# Altium PCB EE209_PCB.PcbDoc
Units mm, origin at the board's own origin, x right, y up, seen from the top; angles counter-clockwise.
Board outline 93.73 x 96.01 mm, 2 copper layers (Top Layer, Bottom Layer); 55 components, 37 nets, 188 pads, 0 vias.
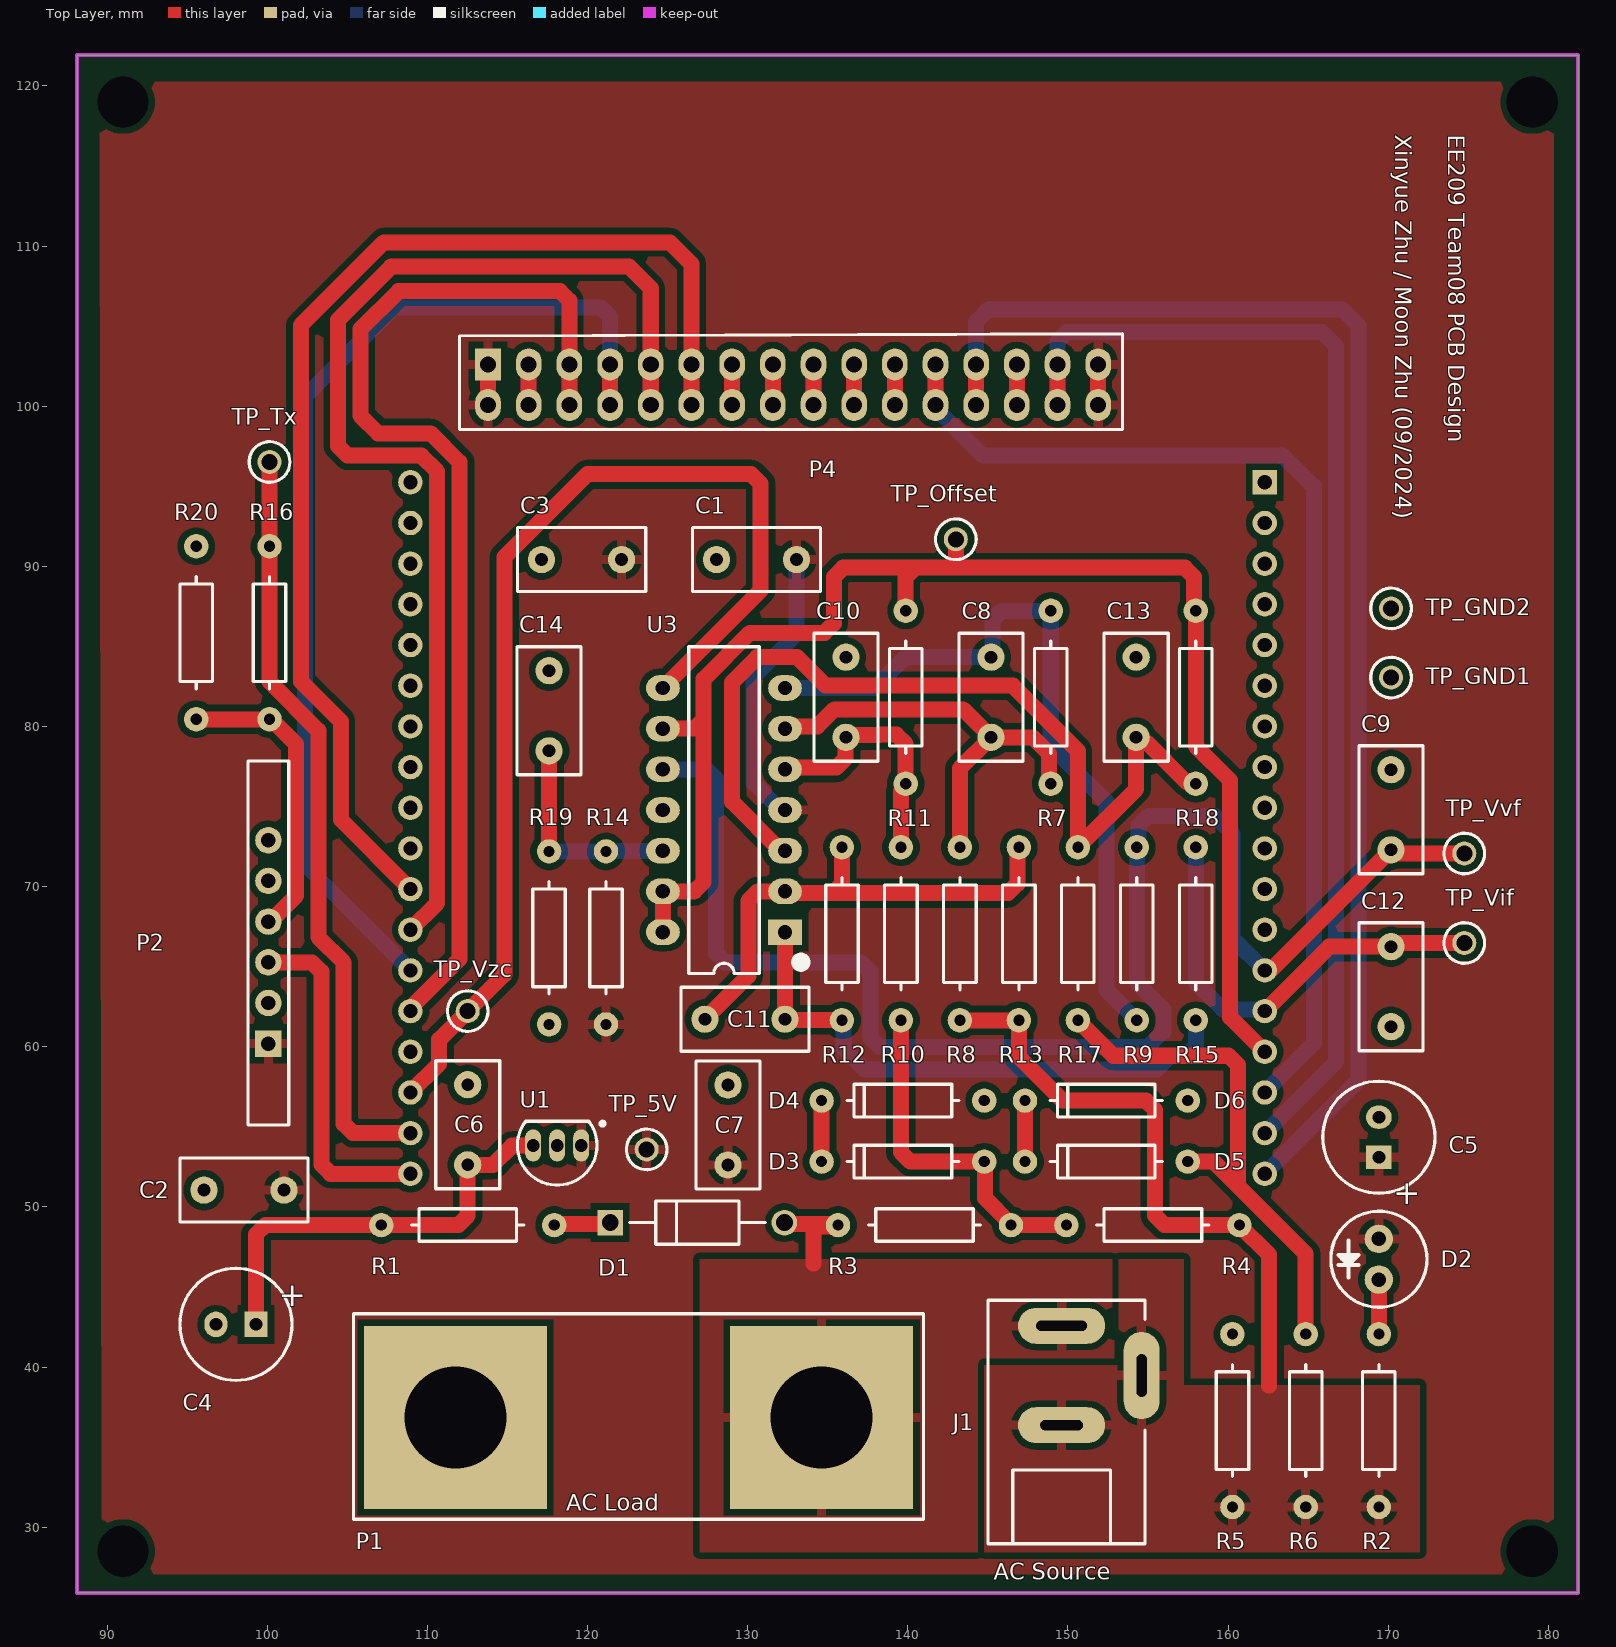
[diagram p0: Top Layer view]
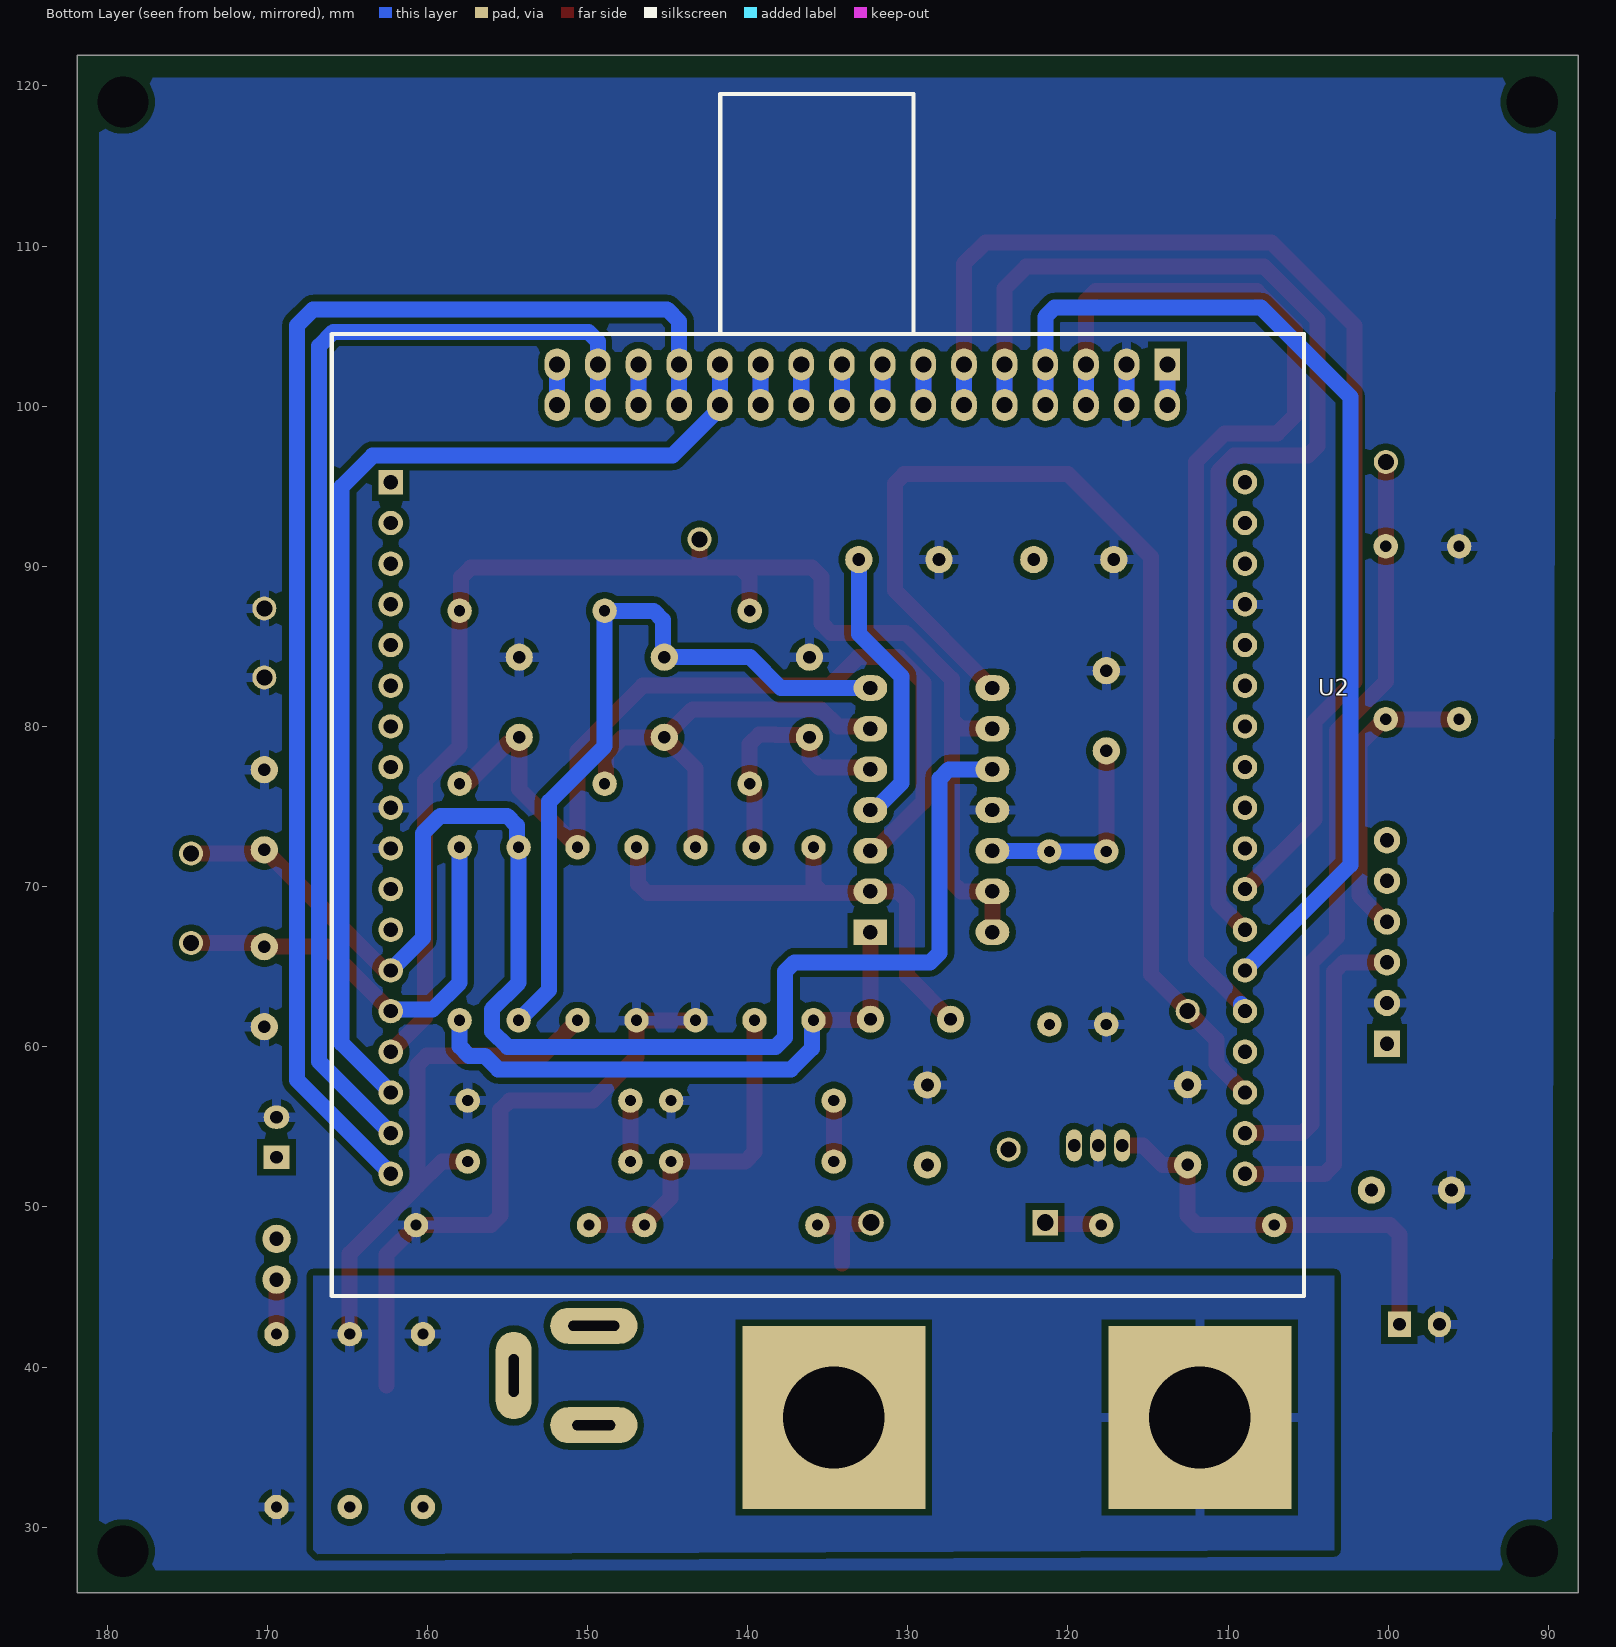
[diagram p1: Bottom Layer view, seen from below]
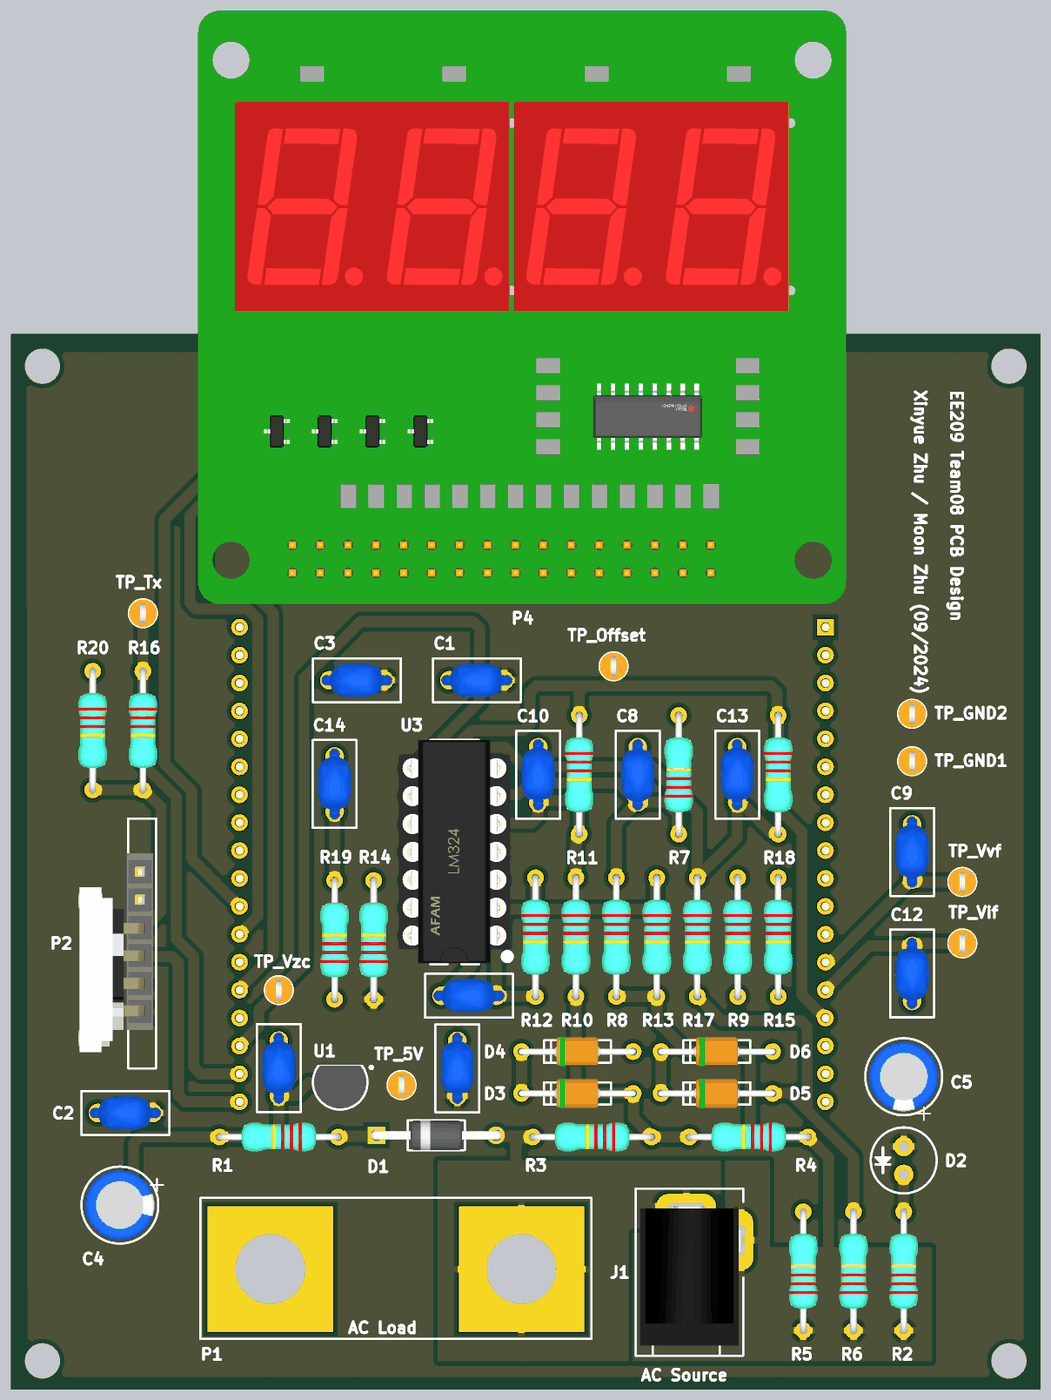
[diagram p2: 3D render of the assembled board from above, using the file's embedded part models]

## Layer stack, top to bottom
Top Solder: solder mask 0.0102, Solder Resist, Dk 3.5
Top Layer: signal copper 0.0356
Dielectric 1: dielectric 0.32, FR-4, Dk 4.8
Bottom Layer: signal copper 0.0356
Bottom Solder: solder mask 0.0102, Solder Resist, Dk 3.5

## Board outline
88.138,25.908 88.138,121.92 181.864,121.92 181.864,25.908

## Design rules (kind name [scope] priority, off if disabled: settings)
BoardOutlineClearance [All] p1: gap=0.5 ignorepadtopadclearanceinfootprint=FALSE
Clearance [All] p1: gap=0.4 ignorepadtopadclearanceinfootprint=FALSE
Height [All] p1: minheight=0 maxheight=50 prefheight=12.7
HoleSize [All] p1: absolutevalues=TRUE maxlimit=10 minlimit=0.4 maxpercent=80.000 minpercent=20.000
MinimumAnnularRing [All] p1: minimumring=0
MinimumSolderMaskSliver [All] p1: minsoldermaskwidth=0.1
PlaneConnect [All] p1: planeconnectstyle=Relief reliefexpansion=0.6 reliefentries=4 reliefconductorwidth=0.6 reliefairgap=0.4
PolygonConnect [All] p1: connectstyle=Relief reliefconductorwidth=0.6 reliefentries=4 polygonreliefangle="90 Angle" airgapwidth=0.4
RoutingVias [All] p1: holewidth=0.6 width=1 viastyle="Through Hole" minholewidth=0.5 minwidth=0.8 maxholewidth=1 maxwidth=2
SMDToCorner [All] p1: distance=157480
SilkToSilkClearance [All] p1: silktosilkclearance=0.1
SilkToSolderMaskClearance [IsPad] p1: minsilkscreentomaskgap=0.1 clearancetoexposedcopper=TRUE
SolderMaskExpansion [All] p1: expansion=0.102 istentingtop=FALSE
SupplyNets "Schematic Supply Nets_24" [InNet('SH_ST')] p1: voltage=0.000
SupplyNets "Schematic Supply Nets_23" [InNet('Offset')] p2: voltage=0.000
SupplyNets "Schematic Supply Nets_22" [InNet('Vrect')] p3: voltage=0.000
SupplyNets "Schematic Supply Nets_21" [InNet('SRCLR')] p4: voltage=0.000
SupplyNets "Schematic Supply Nets_20" [InNet('LED4')] p5: voltage=0.000
SupplyNets "Schematic Supply Nets_19" [InNet('TX')] p6: voltage=0.000
SupplyNets "Schematic Supply Nets_18" [InNet('5V')] p7: voltage=0.000
SupplyNets "Schematic Supply Nets_17" [InNet('Imeas')] p8: voltage=0.000
SupplyNets "Schematic Supply Nets_16" [InNet('SH_DS')] p9: voltage=0.000
SupplyNets "Schematic Supply Nets_15" [InNet('DS1')] p10: voltage=0.000
SupplyNets "Schematic Supply Nets_14" [InNet('GND')] p11: voltage=0.000
SupplyNets "Schematic Supply Nets_13" [InNet('LED3')] p12: voltage=0.000
SupplyNets "Schematic Supply Nets_12" [InNet('LED2')] p13: voltage=0.000
SupplyNets "Schematic Supply Nets_11" [InNet('Vin')] p14: voltage=0.000
SupplyNets "Schematic Supply Nets_10" [InNet('SH_CP')] p15: voltage=0.000
SupplyNets "Schematic Supply Nets_9" [InNet('OE')] p16: voltage=0.000
SupplyNets "Schematic Supply Nets_8" [InNet('Vzc')] p17: voltage=0.000
SupplyNets "Schematic Supply Nets_7" [InNet('DS3')] p18: voltage=0.000
SupplyNets "Schematic Supply Nets_6" [InNet('DS2')] p19: voltage=0.000
SupplyNets "Schematic Supply Nets_5" [InNet('DS4')] p20: voltage=0.000
SupplyNets "Schematic Supply Nets_4" [InNet('Isensp')] p21: voltage=0.000
SupplyNets "Schematic Supply Nets_3" [InNet('RX')] p22: voltage=0.000
SupplyNets "Schematic Supply Nets_2" [InNet('Vsensp')] p23: voltage=0.000
SupplyNets "Schematic Supply Nets_1" [InNet('Vmeas')] p24: voltage=0.000
SupplyNets "Schematic Supply Nets" [InNet('LED1')] p25: voltage=0.000
Width [All] p1: maxlimit=10 minlimit=0.4 preferedwidth=0.6
24 further rules are at their usual default settings.

## Components (designator, comment, footprint, x,y, rotation, side; value= is the part's Value field where it differs from the comment)
C1 "100n" CCAP-5P0 130.556,90.424 r180 top
C2 "4.7u" CCAP-5P0 98.552,51.054 r180 top
C3 "10u" CCAP-5P0 119.634,90.424 r180 top
C4 "4.1879u" "CAP-RAD-2.5mm Pitch" 98.052,42.672 r180 top
C5 "1.3820u" "CAP-RAD-2.5mm Pitch" 169.418,54.356 r90 top
C6 "47u" CCAP-5P0 112.522,55.134 r90 top
C7 "10u" CCAP-5P0 128.778,55.118 r90 top
C8 "5.1185n" CCAP-5P0 145.203,81.828 r270 top
C9 "31.7555n" CCAP-5P0 170.18,74.803 r90 top
C10 "5.1185n" CCAP-5P0 136.144,81.828 r90 top
C11 "2.4678n" CCAP-5P0 129.834,61.722 r180 top
C12 "26.4629n" CCAP-5P0 170.18,63.754 r270 top
C13 "5.1185n" CCAP-5P0 154.261,81.828 r90 top
C14 "3.5436n" CCAP-5P0 117.602,80.986 r90 top
D1 "1N4007" 1N4007-MFG 126.858,49.022 r0 top
D2 "Green" LED 169.418,46.736 r270 top
D3 "BZX79-CXVX" AXIAL-Zener-0.4 139.7,52.832 r180 top
D4 "BZX79-CXVX" AXIAL-Zener-0.4 139.7,56.642 r180 top
D5 "BZX79-CXVX" AXIAL-Zener-0.4 152.4,52.832 r180 top
D6 "BZX79-CXVX" AXIAL-Zener-0.4 152.4,56.642 r180 top
J1 "DC barrel jack" AC-Socket 149.606,36.576 r90 top value=socket
P1 "Dual Banana Plugs" "Dual Banana Plug" 123.19,36.85 r180 top
P2 "BLE Module Header" HM10_HDR1X6 100.076,60.198 r90 top
P4 "Display" Display 131.572,101.346 r180 top
R1 "33" AXIAL-0.4 112.522,48.87 r180 top
R2 "100" AXIAL-0.4 169.418,36.664 r90 top
R3 "56k" AXIAL-0.4 141.046,48.87 r180 top
R4 "2.7k" AXIAL-0.4 155.308,48.87 r180 top
R5 "1.8" AXIAL-0.4 160.274,36.664 r90 top
R6 "0.82" AXIAL-0.4 164.846,36.664 r90 top
R7 "27k" AXIAL-0.4 148.929,81.828 r90 top
R8 "27k" AXIAL-0.4 143.256,67.056 r270 top
R9 "10k" AXIAL-0.4 154.305,67.056 r270 top
R10 "22k" AXIAL-0.4 139.573,67.056 r270 top
R11 "27k" AXIAL-0.4 139.871,81.828 r270 top
R12 "56k" AXIAL-0.4 135.89,67.056 r270 top
R13 "27k" AXIAL-0.4 146.939,67.056 r270 top
R14 "56k" AXIAL-0.4 121.158,66.802 r90 top
R15 "12k" AXIAL-0.4 157.988,67.056 r270 top
R16 "100" AXIAL-0.4 100.149,85.852 r270 top
R17 "27k" AXIAL-0.4 150.622,67.056 r270 top
R18 "56k" AXIAL-0.4 157.988,81.828 r270 top
R19 "39k" AXIAL-0.4 117.602,66.802 r90 top
R20 "100k" AXIAL-0.4 95.574,85.852 r270 top
TP_5V "5003" TP_TH 123.698,53.594 r90 top
TP_GND1 "5003" TP_TH 170.18,83.058 r90 top
TP_GND2 "5003" TP_TH 170.18,87.376 r90 top
TP_Offset "5003" TP_TH 143.002,91.694 r90 top
TP_Tx "5003" TP_TH 100.149,96.52 r90 top
TP_Vif "5003" TP_TH 174.752,66.484 r90 top
TP_Vvf "5003" TP_TH 174.752,72.073 r90 top
TP_Vzc "5003" TP_TH 112.522,62.23 r90 top
U1 "L78L05ACZ" TO-92 118.11,53.848 r90 top
U2 "ATmega328PB Xplained Mini Header" "ATmeg328P Xplained" 135.616,73.66 r180 bottom
U3 "LM324" DIP-14 128.524,74.786 r180 top

## Footprints (in the part's own frame and the unit in brackets; to place one, negate y for a bottom-side part, rotate by r counter-clockwise, add the part's x,y. Pads: shape width x height; smd on the part's side, far side on the other; paste and mask are expansions set on the pad)
1N4007-MFG [mm]
  round 1.6 hole 1.05 paste-2539.97 mask+0: 1(5.438,0)
  rect 1.6x1.6 hole 1.05 paste-2539.97 mask+0: 2(-5.438,0)
  silkscreen extent -4.24,-1.35 4.24,1.35, body extent -6.34,-1.45 6.34,1.45, height 0.25
AC-Socket [mm]
  oval 2.25x5.45 hole 0.635 slot 3.175 at 90 deg: 1(6,0)
  oval 5.45x2.25 hole 0.635 slot 2.667 at 0 deg: 2(2.9,-5)
  oval 2.25x5.45 hole 0.635 slot 2.667 at 90 deg: 3(-0.2,0)
  silkscreen extent -7.6,-5.2 7.6,4.6, body extent -6.7,-5 6,4.2, height 10.5
"ATmeg328P Xplained" [mil]
  rect 60x60 hole 35: 1(-1050,850)
  round 60 hole 35: 2(-1050,750) 3(-1050,650) 4(-1050,550) 5(-1050,450) 6(-1050,350) 7(-1050,250) 8(-1050,150) 9(-1050,50) 10(-1050,-50) 11(-1050,-150) 12(-1050,-250) 13(-1050,-350) 14(-1050,-450) 15(-1050,-550) 16(-1050,-650) 17(-1050,-750) 18(-1050,-850) 19(1050,-850) 20(1050,-750) 21(1050,-650) 22(1050,-550) 23(1050,-450) 24(1050,-350) 25(1050,-250) 26(1050,-150) 27(1050,-50) 28(1050,50) 29(1050,150) 30(1050,250) 31(1050,350) 32(1050,450) 33(1050,550) 34(1050,650) 35(1050,750) 36(1050,850)
  silkscreen extent -1195,-1150 1195,1805, body extent -1201,-1150 1161,1845, height 452
AXIAL-0.4 [mm]
  round 1.524 hole 0.7: 1(-5.4,0) 2(5.4,0)
  silkscreen extent -3.5,-1.02 3.5,1.02, body extent -5.7,-1.3 5.7,1.3, height 2.7
AXIAL-Zener-0.4 [mil]
  round 60 hole 27.56: 1(-200,0) 2(200,0)
  silkscreen extent -138,-40 138,40, body extent -211,-52 211,52, height 92
"CAP-RAD-2.5mm Pitch" [mm] "Cap 6.3 X 11.2"
  rect 1.45x1.6 hole 0.8: 1(-1.25,0)
  oval 1.45x1.6 hole 0.8: 2(1.25,0)
  silkscreen extent -3.5,-3.5 3.5,3.5, body extent -3.15,-3.15 3.15,3.15, height 11.5
CCAP-5P0 [mm]
  round 1.7 hole 0.8: 1(-2.5,0) 2(2.5,0)
  silkscreen extent -4,-2 4,2, body extent -3.25,-1.5 3.25,1.5, height 6.5
DIP-14 [mm] "DIP; 14 Leads; Row Spacing 7.62 mm; Pitch 2.54 mm"
  rect 2.1x1.6 hole 0.9: 1(-3.81,7.62)
  oval 2.1x1.6 hole 0.9: 2(-3.81,5.08) 3(-3.81,2.54) 4(-3.81,0) 5(-3.81,-2.54) 6(-3.81,-5.08) 7(-3.81,-7.62) 8(3.81,-7.62) 9(3.81,-5.08) 10(3.81,-2.54) 11(3.81,0) 12(3.81,2.54) 13(3.81,5.08) 14(3.81,7.62)
  silkscreen extent -5.1,-10.2 2.2,10.2, body extent -5.07,-10.2 5.09,10.12, height 9.47
Display [mm]
  rect 1.6x2 hole 1: 1(17.78,-1.27)
  oval 1.6x2 hole 1: 2(17.78,1.27) 3(15.24,-1.27) 4(15.24,1.27) 5(12.7,-1.27) 6(12.7,1.27) 7(10.16,-1.27) 8(10.16,1.27) 9(7.62,-1.27) 10(7.62,1.27) 11(5.08,-1.27) 12(5.08,1.27) 13(2.54,-1.27) 14(2.54,1.27) 15(0,-1.27) 16(0,1.27) 17(-2.54,-1.27) 18(-2.54,1.27) 19(-5.08,-1.27) 20(-5.08,1.27) 21(-7.62,-1.27) 22(-7.62,1.27) 23(-10.16,-1.27) 24(-10.16,1.27) 25(-12.7,-1.27) 26(-12.7,1.27) 27(-15.24,-1.27) 28(-15.24,1.27) 29(-17.78,-1.27) 30(-17.78,1.27) 31(-20.32,-1.27) 32(-20.32,1.27)
  silkscreen extent -21.84,-3.18 19.56,2.79, body extent -32.6,-50 26.4,4, height 13
"Dual Banana Plug" [mm] "Connector; 2 Position"
  rect 11.43x11.43 hole 6.35: 1(-11.43,0) 2(11.43,0)
  silkscreen extent -17.8,-6.48 17.8,6.35, body extent -17.38,-5.99 17.43,5.99, height 5.5
HM10_HDR1X6 [mil] "Connector; Header; 6 Position"
  rect 65x65 hole 35.43: 1(0,0)
  round 65 hole 35.43: 2(100,0) 3(200,0) 4(300,0) 5(400,0) 6(500,0)
  silkscreen extent -200,-50 695,50, body extent -142,-39 571,228, height 1843
LED [mil]
  round 70 hole 35.43: 1(-50,0) 2(50,0)
  silkscreen extent -118,-118 118,118, body extent -98,-98 98,98, height 413
TO-92 [mm] "TO, Flat Index; 3 In-Line, Axial Leads; Body Dia. 4.5mm; Leads 0.51 x 0.48 mm (max)"
  oval 2x1 hole 0.8: 1(0,-1.5) 2(0,0) 3(0,1.5)
  silkscreen extent -2.48,-2.96 1.5,2.48, body extent -2.4,-2.4 1.53,2.4, height 6.73
TP_TH [mm] "Test Point, Through Hole, Dia 2.54mm"
  round 1.5 hole 1: 1(0,0)
  silkscreen extent -1.27,-1.27 1.27,1.27, body extent -1.27,-1.27 1.27,1.27, height 4.57

## Part data
C1 C2 C3 C6 C7 C8 C9 C10 C11 C12 C13 C14: library part CerCap_TH_5P0, "TH ceramic capacitor with 5mm pitch"
C4 C5: library part ElecCap_TH_2P0, "Electrolytic capacitor with radial package, 2mm pitch and 5.2mm diameter", LatestRevisionDate=17-Jul-2002, LatestRevisionNote="Re-released for DXP Platform.", PackageDescription="Polarized Capacitor; 2 Leads", PackageReference=POLAR0.8, Published=8-Jun-2000, Publisher="Altium Limited"
D1: library part 1N4007_TH_4AX0, "1N4007 1000V standard axial diode", Supplier Part Number 1=1N4007RLGOSCT-ND, ComponentLink1Description=https://www.fairchildsemi.com/datasheets/1N/1N914.pdf, ComponentLink1URL=https://www.fairchildsemi.com/datasheets/1N/1N914.pdf, Supplier 1=Digi-Key
D2: library part LED_TH_2P54, "Typical throughole GaAs LED with 2.54mm pitch", Manufacturer="Generic Components", Class I=Optoelectronic, Class II=LED, Published=8-Jun-2000, Publisher="Altium Limited", Revision="July-2002: Re-released for DXP Platform."
D3 D4 D5 D6: library part Zener_TH_4AX0, "Axial zener diode BZX79 series", Manufacturer="Nexperia USA Inc.", Manufacturer Part Number=BZX79-C4V7,143, Operating Temperature="-65°C ~ 200°C", Package / Case="DO-204AH, DO-35, Axial", Supplier Device Package=DO-35, Supplier Part Number 1=1727-1864-1-ND, Tolerance=±5%, Category="Discrete Semiconductor Products", ComponentLink1Description=https://assets.nexperia.com/documents/data-sheet/BZX79.pdf, ComponentLink1URL=https://assets.nexperia.com/documents/data-sheet/BZX79.pdf, Mounting Type="Through Hole", Packaging="Cut Tape (CT)", Part Status=Active, Pricing 1="1=0.23, 10=0.206, 100=0.1123, 500=0.06912, 1000=0.04714 (NZD)", RoHS="RoHS Compliant", Stock 1=8933, Supplier 1=Digi-Key
J1: library part AC_Input, "DC barrel jack connection to AC source"
P1: library part AC_Output, "Dual banana plugs connection to the AC load", LatestRevisionDate=17-Jul-2002, LatestRevisionNote="Re-released for DXP Platform.", Publisher="Altium Limited"
P2: library part BLEModule_TH, "2.54mm pitch 6-pin header for BLE module", LatestRevisionDate=17-Jul-2002, LatestRevisionNote="Re-released for DXP Platform.", Publisher="Altium Limited"
P4: "16-Pin Header Connecting Display"
R1 R2 R3 R4 R5 R6 R7 R8 R9 R10 R11 R12 R13 R14 R15 R16 R17 R18 R19 R20: library part Res_TH_0AX4, "Through hole resistor", ComponentLink1Description=http://www.royalohm.com/pdf/product2017/PrecisionMetalMF.pdf, LatestRevisionDate=17-Jul-2002, LatestRevisionNote="Re-released for DXP Platform.", PackageReference=AXIAL-0.4, Published=8-Jun-2000, Publisher="Altium Limited"
TP_5V TP_GND1 TP_GND2 TP_Offset TP_Tx TP_Vif TP_Vvf TP_Vzc: library part TestPoint, "Test Point, Orange, 1-Pin THD, RoHS", Forward Current="3 A", Forward Voltage="1.08 V", Max Operating Temperature="150 degC", Max Surge Current="80 A", Min Operating Temperature="-65 degC", Package Quantity=500, Peak Reverse Current="600 uA", ComponentLink1Description="Manufacturer URL", ComponentLink1URL=http://www.keyelco.com/, ComponentLink2Description=Datasheet, ComponentLink2URL=http://keyelco.com/userAssets/file/M65p56.pdf, DatasheetVersion=Jun-15, Diameter="5.3 mm", Height="0.25 inch", Length="9.5 mm", Mount="Through Hole", PackageDescription="1-Pin Through Hole Device, Dia 2.54 mm", PackageReference=5003, Packaging=Bulk, Pins=2, Radiation Hardening=No, REACH SVHC="No SVHC", RoHSCompliant=true, Weight="0.01 lb", Width="0.25 inch"
U1: library part L78L05_TH_TO92, "Voltage Regulator 5V", Base Part Number=LM78L05, Current - Output=100mA, Manufacturer="ON Semiconductor", Manufacturer Part Number=LM78L05ACZX, Operating Temperature="-40°C ~ 125°C", Package / Case="TO-226-3, TO-92-3 (TO-226AA) (Formed Leads)", Supplier Device Package=TO-92-3, Supplier Part Number 1=LM78L05ACZXCT-ND, Voltage - Input (Max)=30V, Voltage - Output (Max)=-, Voltage - Output (Min/Fixed)=5V, Category="Integrated Circuits (ICs)", ComponentLink1Description=https://www.fairchildsemi.com/datasheets/MC/MC78L05A.pdf, ComponentLink1URL=https://www.fairchildsemi.com/datasheets/MC/MC78L05A.pdf, Control Features=-, Mounting Type="Through Hole", Output Configuration=Positive, Output Type=Fixed, Packaging="Cut Tape (CT)", Part Status=Active, Pricing 1="1=0.69, 10=0.517, 100=0.3226, 500=0.2207, 1000=0.16976 (NZD)", Protection Features="Over Temperature, Short Circuit", PSRR="80dB (120Hz)", RoHS="RoHS Compliant", Stock 1=7782, Supplier 1=Digi-Key, Voltage Dropout (Max)=-
U2: library part ATmega328PBXplained_TH, "Dual 18-pin headers connecting to ATmega328PB Xplained Mini", Manufacturer="Microchip Technology", Manufacturer Part Number=ATMEGA328PB-XMINI, Operating System=-, Supplier Part Number 1=ATMEGA328PB-XMINI-ND, Board Type="Evaluation Platform", Category="Development Boards, Kits, Programmers", ComponentLink1Description=http://www.microchip.com/mymicrochip/filehandler.aspx?ddocname=en589665, ComponentLink1URL=http://www.microchip.com/mymicrochip/filehandler.aspx?ddocname=en589665, Contents=Board(s), Core Processor=AVR, For Use With/Related Products=ATmega328P, Mounting Type=Fixed, Part Status=Active, Platform="ATmega328P Xplained Mini", Pricing 1="1=15.11 (NZD)", RoHS="RoHS Compliant", Stock 1=454, Supplier 1=Digi-Key, Type="MCU 8-Bit"
U3: library part LM324N_TH_DIP16, "IC OPAMP GP 14DIP", Current - Supply=1mA, Manufacturer="ON Semiconductor", Manufacturer Part Number=LM324N, Operating Temperature="0°C ~ 70°C", Package / Case="14-DIP (0.300\", 7.62mm)", Supplier Device Package=14-DIP, Supplier Part Number 1=LM324NFS-ND, Voltage - Supply, Single/Dual (±)="3 V ~ 32 V, ±1.5 V ~ 16 V", Amplifier Type="General Purpose", Base Part Number=LM324, Category="Integrated Circuits (ICs)", ComponentLink1Description=https://www.fairchildsemi.com/datasheets/LM/LM2902.pdf, ComponentLink1URL=https://www.fairchildsemi.com/datasheets/LM/LM2902.pdf, Mounting Type="Through Hole", Output Type=-, Packaging=Tube, Part Status=Active, Pricing 1="1=0.9, 10=0.775, 100=0.5789, 500=0.45482, 1000=0.35145 (NZD)", RoHS="RoHS Compliant", Slew Rate=-, Stock 1=2900, Supplier 1=Digi-Key

## Free pads (board coordinates)
  round 1.524 hole 3.2: 7(91,119) 8(179,119) 9(91,28.5) 10(179,28.5)

## Nets (pads, with @x,y where several pads share a name; then routed paths per layer and width w, separated by ;. In a path a pad name is that pad's centre, name@x,y a point inside that pad or via, vN(x,y) a via of type N, cw(c..) or ccw(c..) an arc to the next point about the centre after c; other vN are vias at no path point)
5V: C1.1 C2.1 C3.1 C5.1 C7.1 D2.1 P2.1 P4.1 P4.2 P4.31 P4.32 R14.1 TP_5V.1 U1.1 U3.4 | length 27.9
  Top Layer w1: P4.2 P4.1 ; P4.32 P4.31
  Bottom Layer w1: P4.2 P4.1 ; U3.4 132.084,74.786 130.384,76.486 130.384,83.11 133.056,85.782 C1.1 ; P4.32 P4.31
DS1: P4.5 P4.6 U2.23 | length 72.5
  Top Layer w1: U2.23 108.946,62.372 109.208,62.634 109.208,62.682 112.008,65.482 112.008,96.518 110.214,98.312 106.92,98.312 105.824,99.408 105.824,104.808 108.204,107.188 118.286,107.188 118.872,106.602 P4.5 P4.6 P4.6@118.872,100.012
  Bottom Layer w1: U2.23 108.946,62.372 109.208,62.634 U2.23@109.208,62.682 ; P4.5@118.757,102.731 P4.5 P4.6
DS2: P4.7 P4.8 U2.24 | length 68.2
  Top Layer w1: P4.8 P4.7
  Bottom Layer w1: U2.24 102.362,71.354 102.362,100.584 107.95,106.172 120.826,106.172 121.412,105.586 P4.7 P4.8
DS3: P4.9 P4.10 U2.25 | length 75.3
  Top Layer w1: U2.25 110.608,68.972 110.608,95.938 109.634,96.912 106.34,96.912 105.018,96.912 104.424,97.506 104.424,105.388 107.748,108.712 122.604,108.712 123.952,107.364 P4.9 P4.10
  Bottom Layer w1: P4.10 P4.9
DS4: P4.11 P4.12 U2.26 | length 76.5
  Top Layer w1: U2.26 104.602,74.194 104.602,80.329 102.108,82.823 102.108,105.052 107.292,110.236 125.144,110.236 126.492,108.888 P4.11 P4.12
  Bottom Layer w1: P4.12 P4.11
GND: C1.2 C2.2 C3.2 C4.2 C5.2 C6.2 C7.2 C9.2 C10.2 C12.2 C13.2 C14.2 D4.1 D6.1 J1.2 J1.3 P2.2 P4.3 P4.4 R2.1 R4.1 R5.1 R6.1 R8.2 R13.2 R19.1 R20.1 TP_GND1.1 TP_GND2.1 U1.2 U2.9 U2.10 U2.33 U3.11 | length 43.8
  Top Layer w1: P4.4 P4.3 ; R8.2 R13.2 146.939,59.373 149.67,56.642 154.862,56.642 155.448,56.056 155.448,49.455 156.034,48.87 R4.1 162.56,47.017 162.56,38.862
  Bottom Layer w1: P4.4 P4.3
Imeas: C12.1 R15.1 TP_Vif.1 U2.14 | length 27.7
  Top Layer w1: U2.14 166.31,66.254 C12.1 170.369,66.254 170.599,66.484 TP_Vif.1
  Bottom Layer w1: R15.1 157.988,64.008 159.666,62.33 162.186,62.33 U2.14
Isensp: D5.1 P1.2 R5.2 R6.2 R17.2 | length 33.4
  Top Layer w1: R17.2 152.835,59.443 160.038,59.443 160.624,58.857 160.624,53.615 160.624,51.382 ; D5.1 159.096,52.832 160.585,51.343 161.036,50.892 164.846,47.082 R6.2
LED1: P4.13 P4.14 | length 5.1
  Top Layer w1: P4.14 P4.13
  Bottom Layer w1: P4.14 P4.13
LED2: P4.15 P4.16 | length 5.1
  Top Layer w1: P4.16 P4.15
  Bottom Layer w1: P4.16 P4.15
LED3: P4.17 P4.18 | length 5.1
  Top Layer w1: P4.18 P4.17
  Bottom Layer w1: P4.18 P4.17
LED4: P4.19 P4.20 | length 5.1
  Top Layer w1: P4.20 P4.19
  Bottom Layer w1: P4.20 P4.19
NetC8_1: C8.1 R7.2 R9.2 U3.7 | length 47.9
  Top Layer w1: C8.1 C8.1@145.288,84.413 ; R7.2@148.844,87.143 R7.2
  Bottom Layer w1: U3.7 137.919,82.406 139.841,84.328 C8.1 145.288,84.413 145.288,86.642 145.874,87.228 R7.2 148.929,78.778 152.4,75.308 152.4,63.561 R9.2
NetC8_2: C8.2 R7.1 R8.1 U3.6 | length 27.7
  Top Layer w1: U3.6 132.449,79.981 133.123,79.981 133.152,80.01 134.351,80.01 135.419,81.078 143.453,81.078 C8.2 ; R8.1 143.256,77.381 C8.2 ; R7.1 148.829,76.528 148.829,78.299 147.8,79.328 C8.2
NetC10_1: C10.1 R10.1 R11.2 U3.5 | length 16
  Top Layer w1: U3.5 132.449,77.441 135.536,77.441 136.122,78.027 136.122,79.306 136.278,79.462 138.245,79.462 138.285,79.502 139.285,79.502 139.871,78.916 R11.2 139.871,76.286 139.573,75.988 R10.1
NetC11_1: C11.1 R12.2 R15.2 U3.1 | length 35.6
  Top Layer w1: U3.1 132.334,61.689 135.857,61.689 R12.2
  Bottom Layer w1: R12.2 135.99,61.556 135.99,59.896 137.292,58.594 155.573,58.594 156.415,59.436 157.402,59.436 157.988,60.022 R15.2
NetC11_2: C11.2 R12.1 R13.1 U3.2 | length 31.3
  Top Layer w1: C11.2 130.048,64.436 130.048,69.12 130.634,69.706 U3.2 132.444,69.596 135.304,69.596 ; R12.1 135.89,70.182 135.812,70.104 135.304,69.596 ; R13.1 146.839,72.356 146.839,70.182 146.253,69.596 135.304,69.596
NetC13_1: C13.1 R17.1 R18.2 U3.3 | length 56
  Top Layer w1: U3.3 132.084,72.246 129.032,75.298 129.032,82.764 130.596,84.328 133.096,84.328 134.874,82.55 146.558,82.55 150.622,78.486 R17.1 154.261,76.095 C13.1 154.451,79.328 154.801,78.978 154.956,78.978 157.406,76.528 157.888,76.528 R18.2
NetC14_1: C14.1 R14.2 R19.2 U3.12 | length 13.4
  Top Layer w1: R19.2 C14.1
  Bottom Layer w1: R19.2 R14.2 121.18,72.224 124.692,72.224 U3.12
NetD1_2: D1.2 R1.1 | length 3.6
  Top Layer w1: R1.1 117.998,48.946 121.344,48.946 D1.2
NetD2_2: D2.2 R2.2 | length 3.4
  Top Layer w1: R2.2 D2.2
NetD3_2: D3.2 D4.2 | length 3.8
  Top Layer w1: D3.2 D4.2
NetD5_2: D5.2 D6.2 | length 3.8
  Top Layer w1: D5.2 D6.2
NetP2_4: P2.4 R16.2 R20.2 | length 18.7
  Top Layer w1: R20.2 100.244,80.452 101.802,78.895 101.802,69.439 100.181,67.818 P2.4
OE: P4.27 P4.28 | length 5.1
  Top Layer w1: P4.28 P4.27
  Bottom Layer w1: P4.28 P4.27
Offset: R11.1 R18.1 TP_Offset.1 U2.15 U3.9 U3.13 U3.14 | length 92.4
  Top Layer w1: U3.14 U3.13 126.668,69.706 127.254,70.292 127.254,80.452 ; U3.9 126.668,79.866 127.254,80.452 ; R11.1 139.871,89.33 140.457,89.916 ; TP_Offset.1 143.002,89.916 ; U2.15 160.137,61.839 160.137,76.629 157.988,78.778 R18.1 157.888,87.328 157.888,89.33 157.302,89.916 143.002,89.916 ; 127.254,80.452 127.254,82.966 130.14,85.852 134.796,85.852 135.382,86.438 135.382,89.33 135.968,89.916 140.457,89.916 ; 140.457,89.916 143.002,89.916
RX: P2.3 U2.19 | length 21.4
  Top Layer w1: P2.3 102.792,65.278 103.378,64.692 103.378,52.656 103.964,52.07 U2.19
SH_CP: P4.23 P4.24 U2.16 | length 70
  Top Layer w1: P4.24 P4.23
  Bottom Layer w1: P4.23 P4.24 141.732,99.876 144.696,96.912 163.421,96.912 165.354,94.979 165.354,60.218 U2.16
SH_DS: P4.29 P4.30 U2.17 | length 75.6
  Top Layer w1: P4.30@149.352,100.012 P4.30 P4.29
  Bottom Layer w1: P4.30 149.352,104.056 149.944,104.648 165.867,104.648 166.754,103.761 166.754,59.078 U2.17
SH_ST: P4.25 P4.26 U2.18 | length 87.8
  Top Layer w1: P4.26 P4.25
  Bottom Layer w1: P4.26 P4.25 144.272,105.291 145.029,106.048 167.137,106.048 168.154,105.031 168.154,57.938 U2.18
SRCLR: P4.21 P4.22 | length 5.1
  Top Layer w1: P4.22 P4.21
  Bottom Layer w1: P4.22 P4.21
TX: R16.1 TP_Tx.1 U2.20 | length 47.7
  Top Layer w1: TP_Tx.1 R16.1 100.149,82.802 103.202,79.75 103.202,66.849 104.778,65.272 104.778,55.196 105.364,54.61 U2.20
Vin: D1.1 J1.1 P1.1 R3.2 | length 7.1
  Top Layer w1: D1.1 132.373,48.946 135.57,48.946 R3.2 135.546,48.769 134.445,48.769 134.112,48.436 134.112,46.482
Vmeas: C9.1 R9.1 TP_Vvf.1 U2.13 U3.10 | length 92.8
  Top Layer w1: U2.13 162.386,64.87 162.747,64.87 C9.1 170.369,72.303 170.599,72.073 TP_Vvf.1
  Bottom Layer w1: U3.10 127.43,77.326 128.016,76.74 128.016,65.864 128.602,65.278 137.082,65.278 137.668,64.692 137.668,60.58 138.254,59.994 154.993,59.994 155.967,60.968 155.967,62.344 154.305,64.006 R9.1 154.405,72.556 154.405,73.809 155.018,74.422 159.18,74.422 160.274,73.328 160.274,66.782 U2.13
Vrect: C4.1 C6.1 R1.2 U1.3 | length 27.1
  Top Layer w1: C4.1 99.302,48.284 99.888,48.87 R1.2 111.936,48.87 112.522,49.455 C6.1 114.102,52.634 115.299,53.831 116.61,53.831 U1.3
Vsensp: D3.1 R3.1 R4.2 R10.2 | length 21.8
  Top Layer w1: R10.2 139.573,53.418 140.159,52.832 D3.1 144.813,52.799 144.813,50.57 146.446,48.937 R3.1 R4.2
Vzc: TP_Vzc.1 U2.21 U3.8 | length 69.5
  Top Layer w1: U2.21 110.736,58.94 110.736,60.444 114.808,64.516 114.808,90.573 119.993,95.758 130.224,95.758 130.81,95.172 130.81,88.502 U3.8
pads on no net: P2.5 P2.6 U2.1 U2.2 U2.3 U2.4 U2.5 U2.6 U2.7 U2.8 U2.11 U2.12 U2.22 U2.27 U2.28 U2.29 U2.30 U2.31 U2.32 U2.34 U2.35 U2.36

## Polygon pours and split planes (outlines as drawn)
GND on Top Layer "GND_L01_P005" (solid, pour order 5): 144.78,28.448 171.958,28.448 171.958,38.862 157.226,38.862 157.226,46.736 153.162,46.736 153.162,40.132 144.78,40.132
Vin on Top Layer "VIN_L01_P006" (solid, pour order 6): 144.526,28.448 144.526,40.386 152.908,40.386 152.908,46.736 127,46.736 127,28.448
5V on Top Layer "5V_L01_P008" (solid, pour order 8): 89.662,27.051 180.34,27.051 180.34,120.269 89.543,120.269
Isensp on Bottom Layer "ISENSP_L02_P007" (solid, pour order 7): 103.378,28.576 103.378,45.72 167.132,45.72 167.132,28.322
GND on Bottom Layer "GND_L02_P009" (solid, pour order 9): 89.803,27.305 180.481,27.305 180.481,120.523 89.521,120.523

## Keep-outs
Top Layer:
  the board outline again, w0.254

## Silkscreen, mask and mechanical layers (free items; w line width, h text height)
Top Overlay:
  text "Xinyue Zhu / Moon Zhu (09/2024)" at 170.449,116.968 h1.02 r270
  text "EE209 Team08 PCB Design" at 173.751,116.968 h1.02 r270
  text "AC Load" at 118.686,31.04 h1.02
  text "AC Source" at 145.356,26.722 h1.02
Mechanical 1:
  lines w0.254: 88.138,25.908 181.864,25.908 ; 88.138,25.908 88.138,121.92 ; 88.138,25.908 181.864,25.908 ; 88.138,25.908 88.138,121.92 ; 88.138,121.92 181.864,121.92 ; 88.138,121.92 181.864,121.92 ; 181.864,25.908 181.864,121.92 ; 181.864,25.908 181.864,121.92

## Text inside footprints (layer, text, board x,y; h text height)
C4: Top Overlay "+" at 102.452,45.072 h1.5 r180
C5: Top Overlay "+" at 171.818,49.956 h1.5 r90